# Altium PCB PCB2.PcbDoc (part 1 of 3)
Units mil, origin at the board's own origin, x right, y up, seen from the top; angles counter-clockwise.
Board outline 7000 x 3315 mil, 4 copper layers (Top Signal, GND, PWR, Bottom Signal), stack 23.756 mil thick; 198 components, 124 nets, 690 pads, 273 vias.
Unrouted connection lines stored in the file: 2.
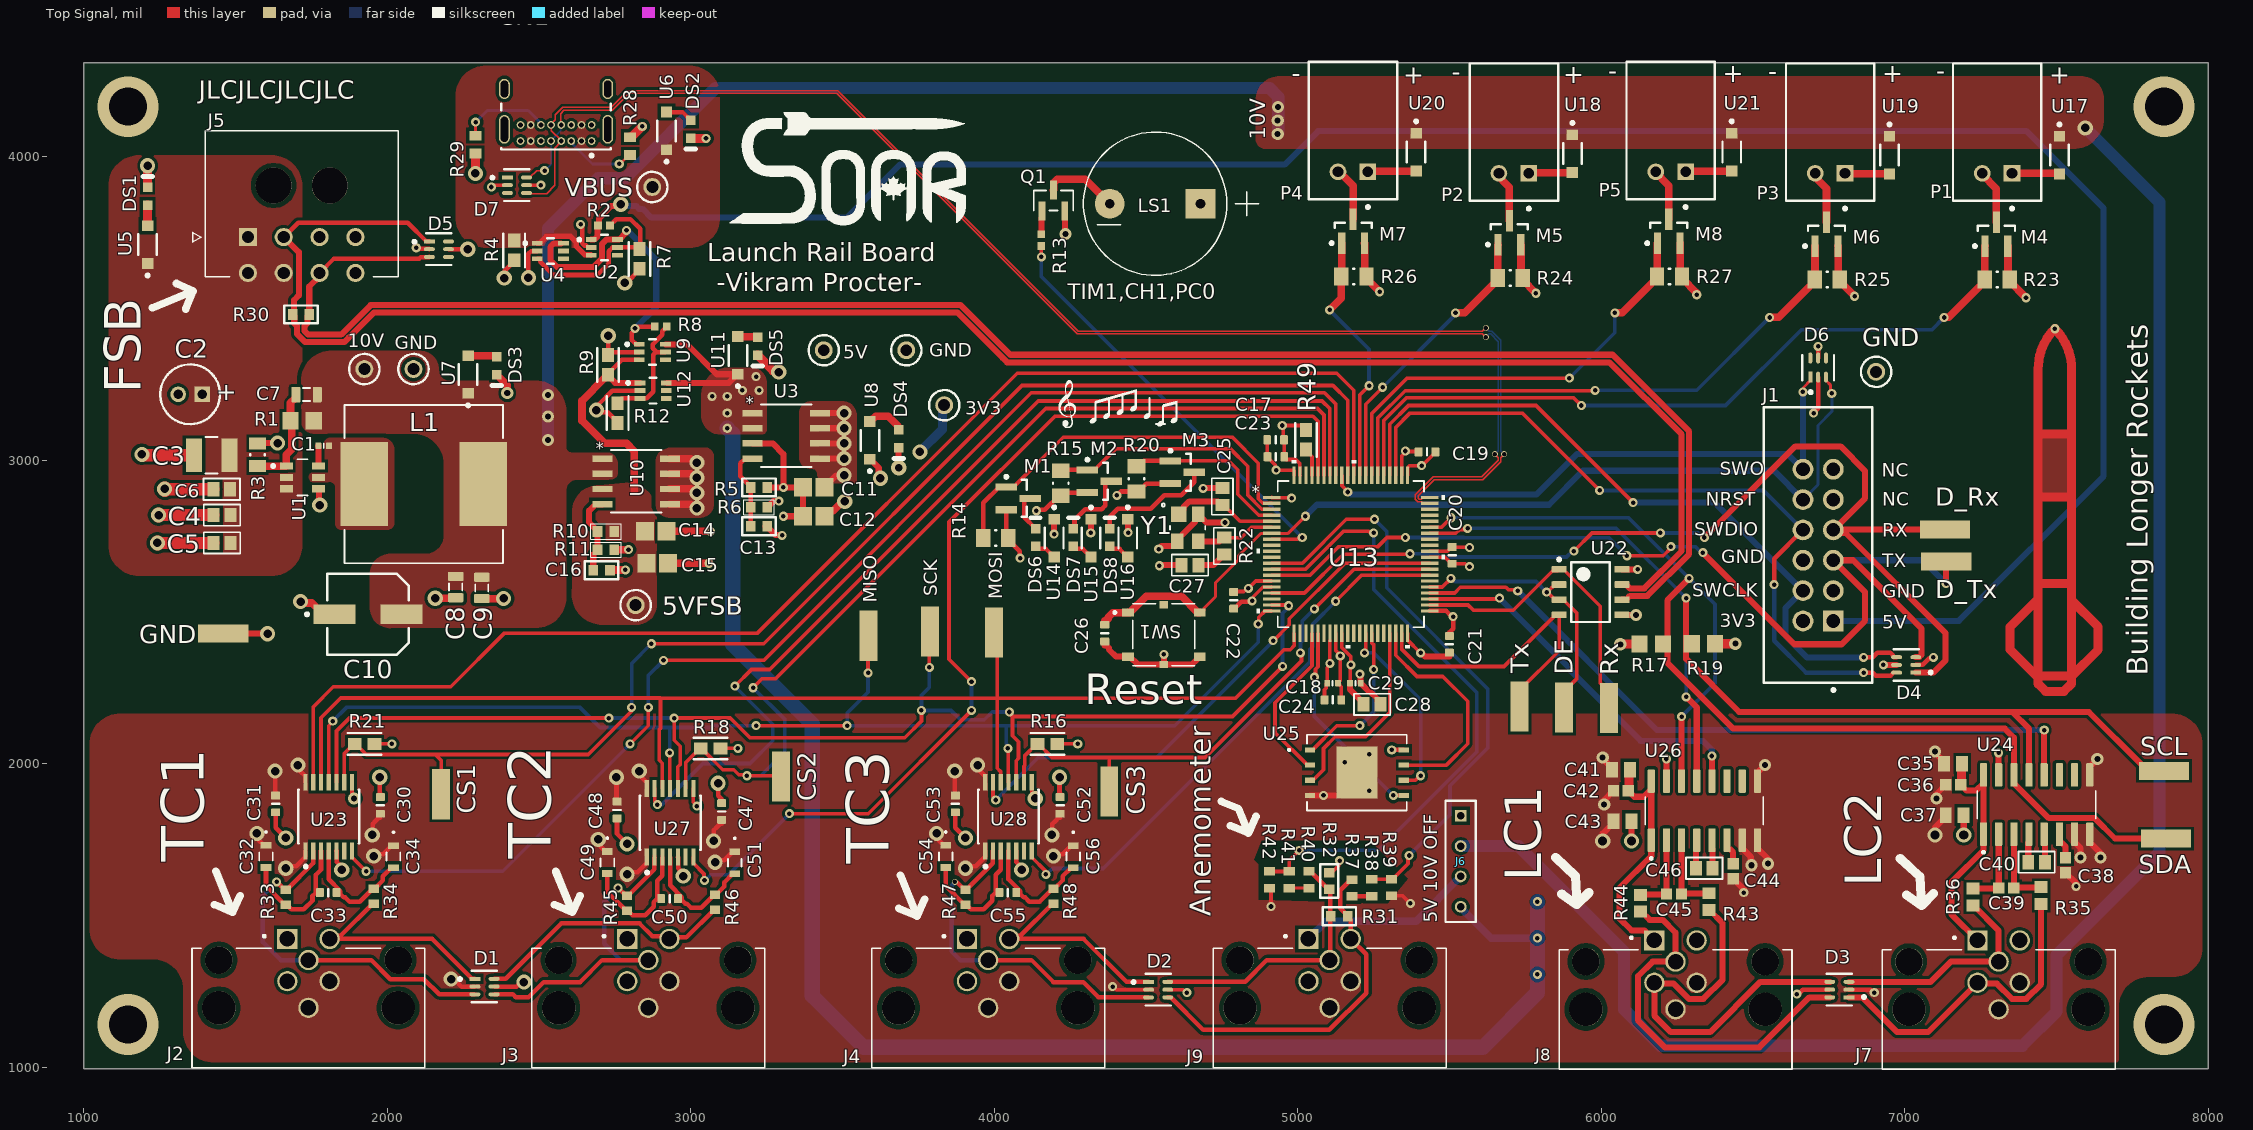
[diagram p0: Top Signal view]
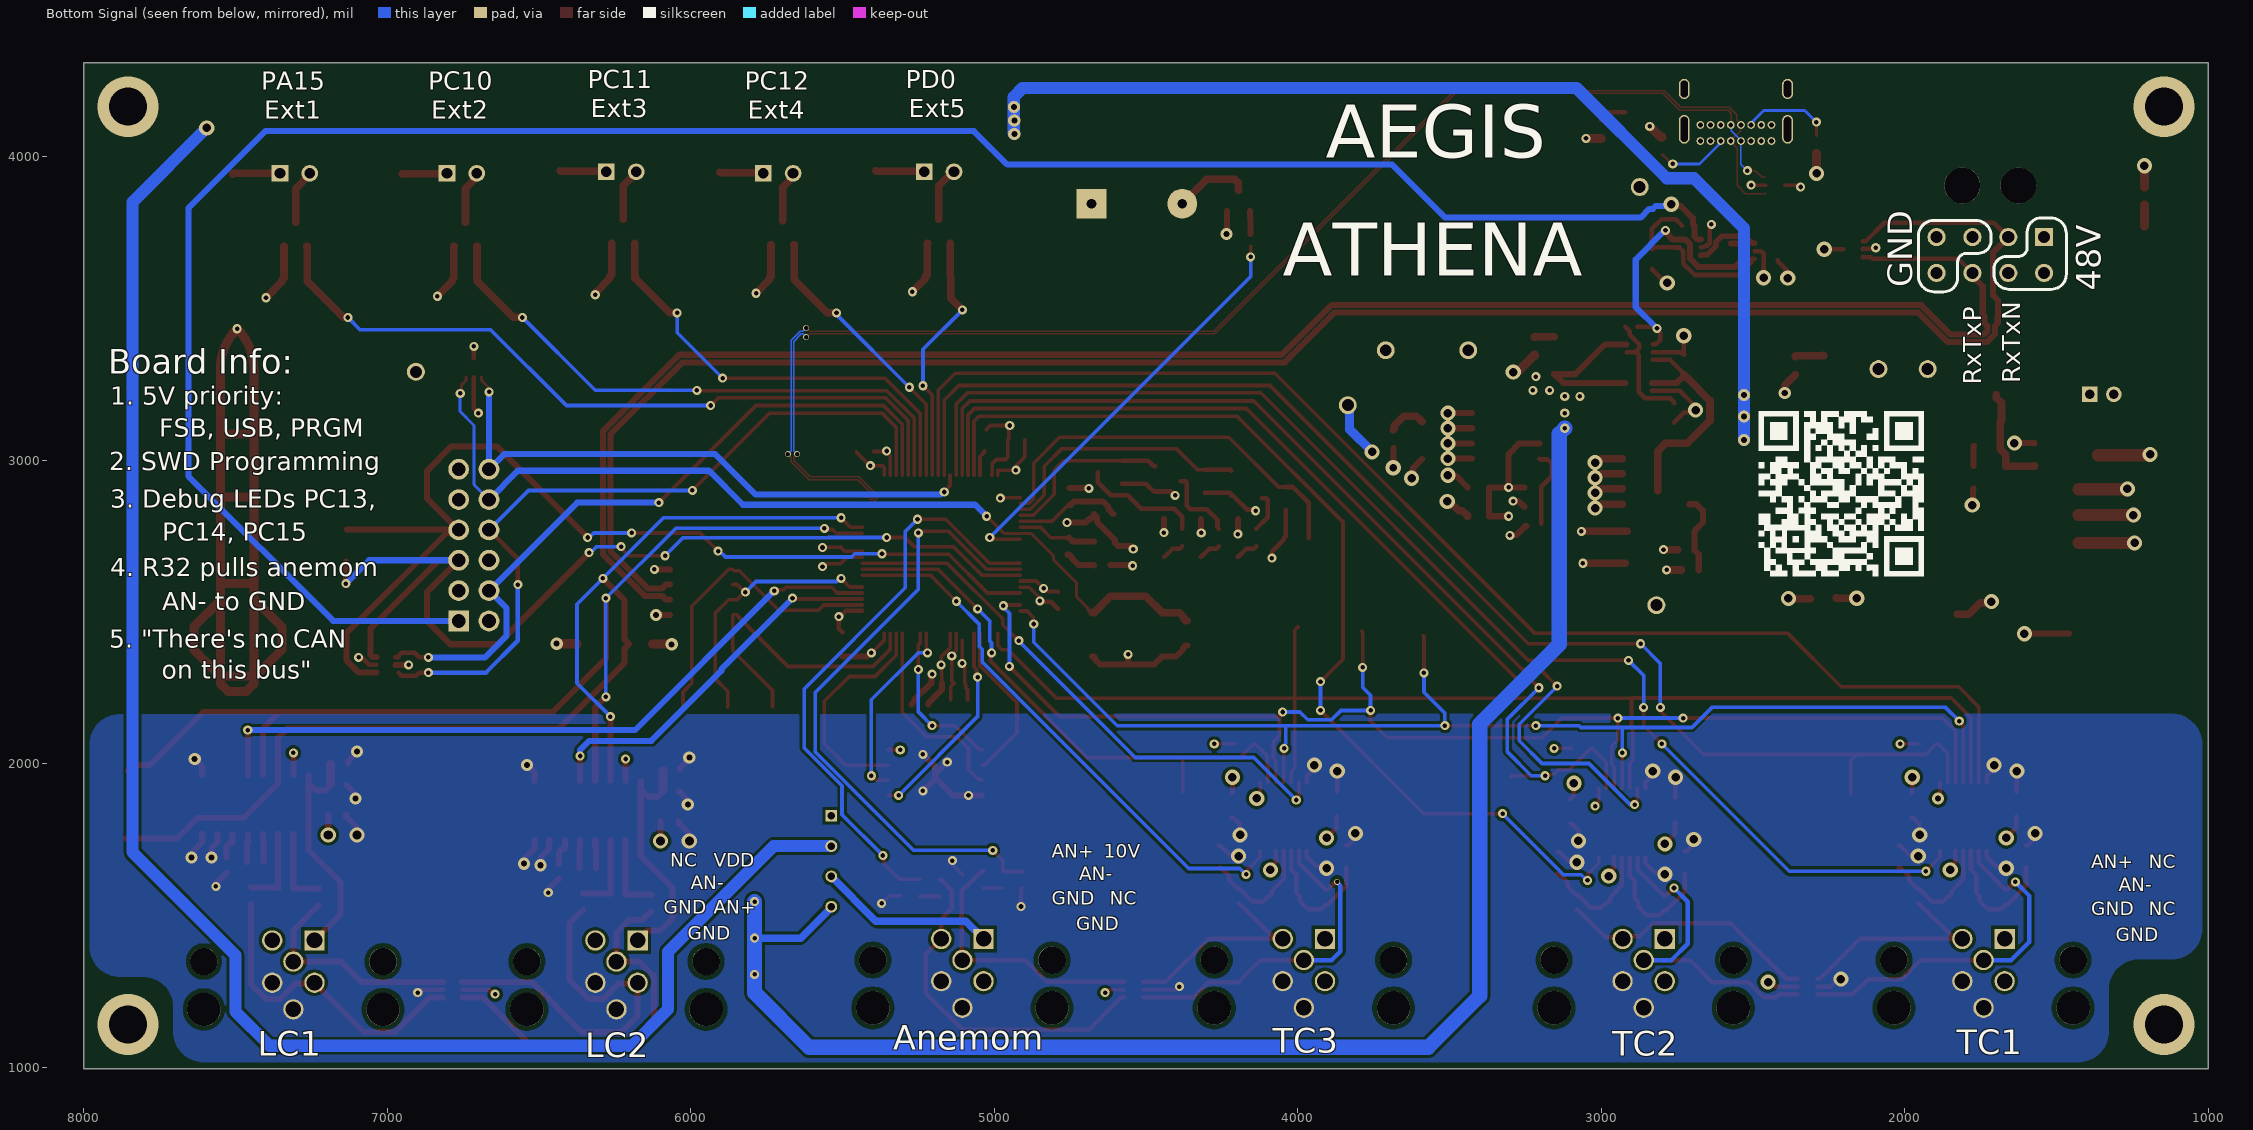
[diagram p1: Bottom Signal view, seen from below]
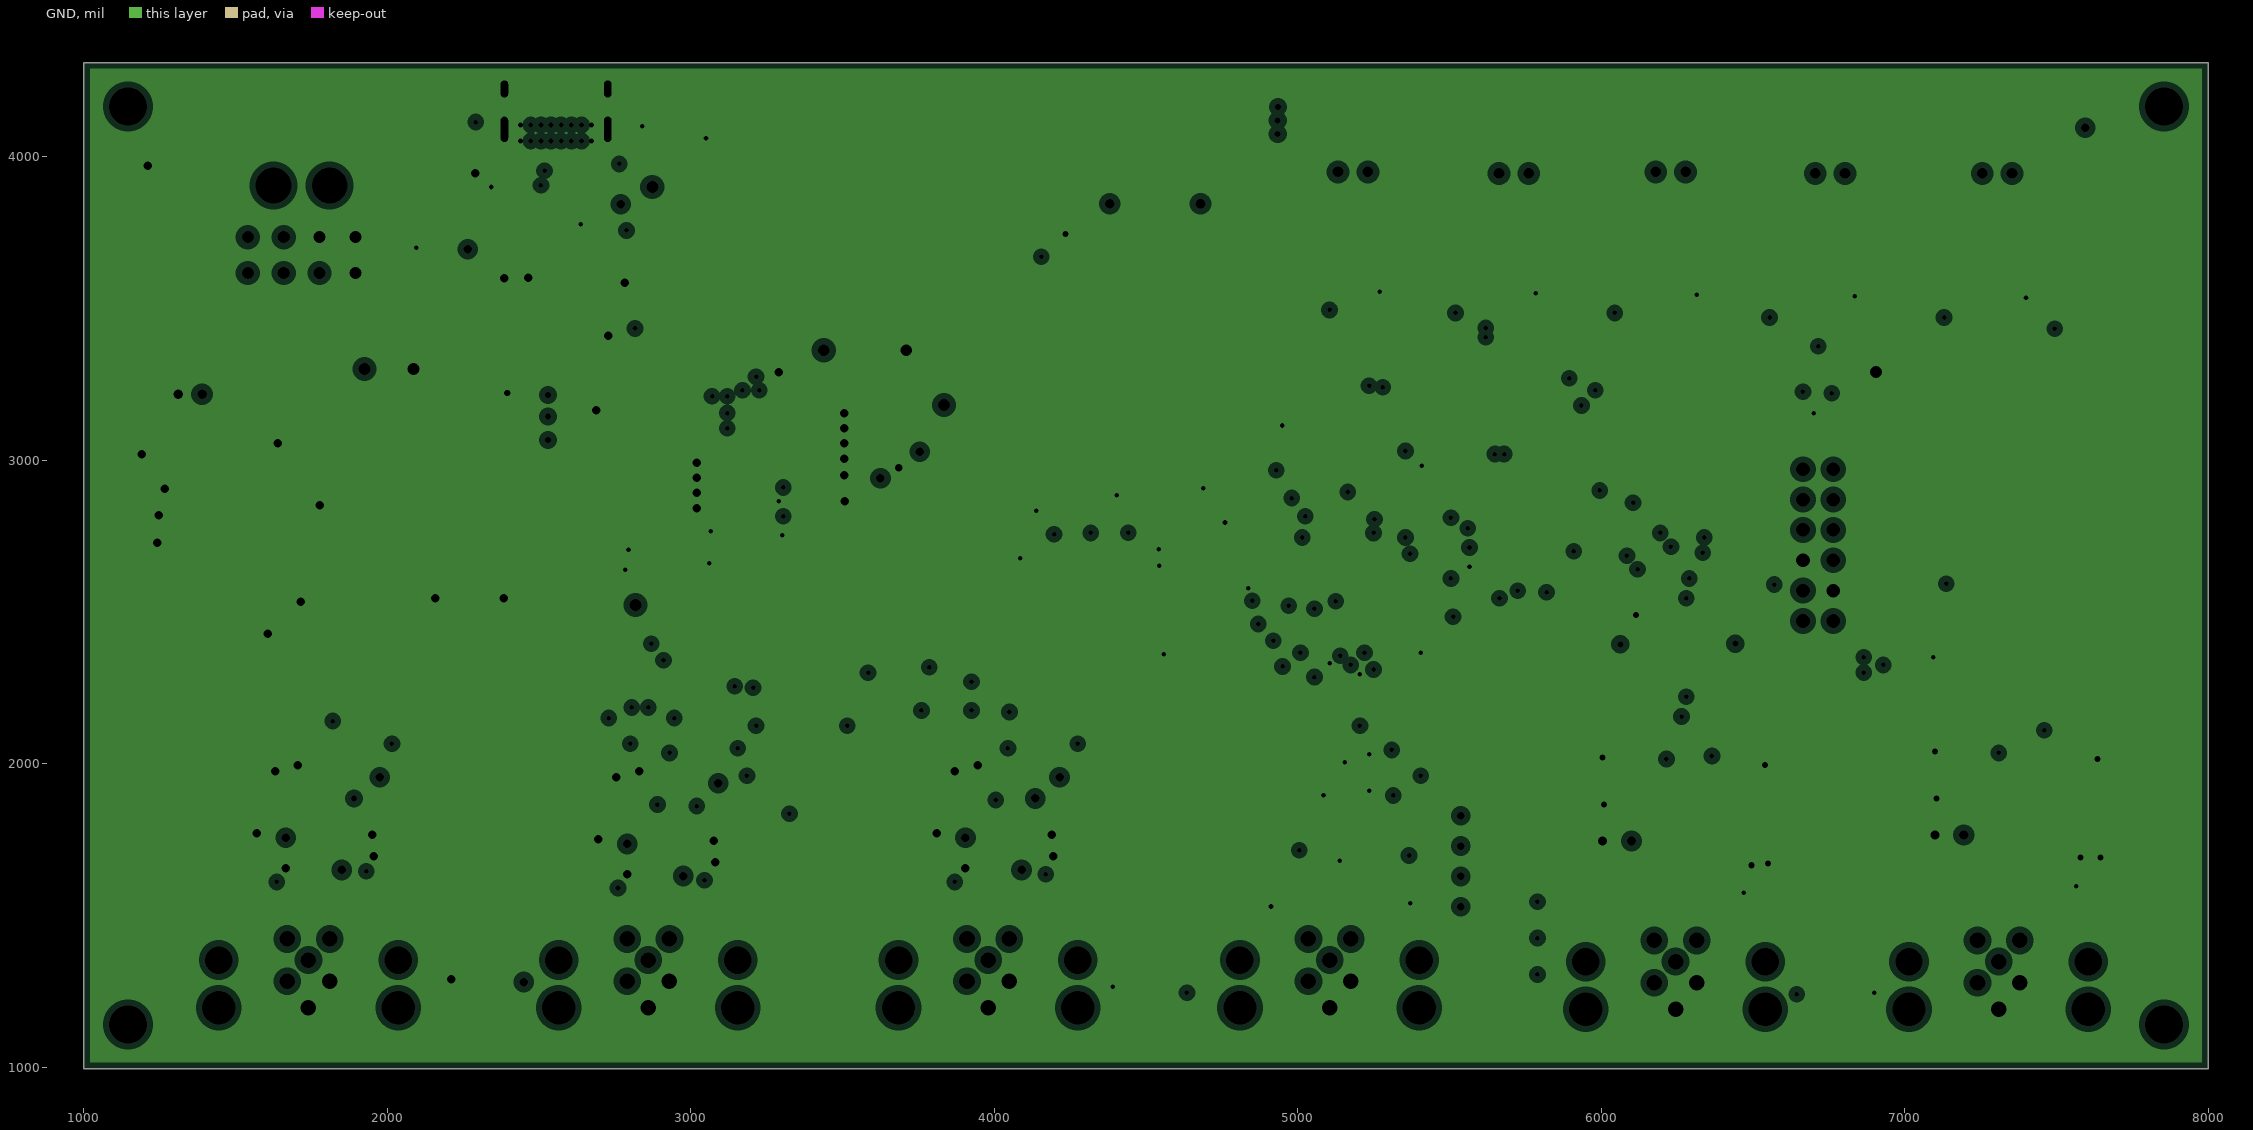
[diagram p2: GND, clearances drawn from the general rule]
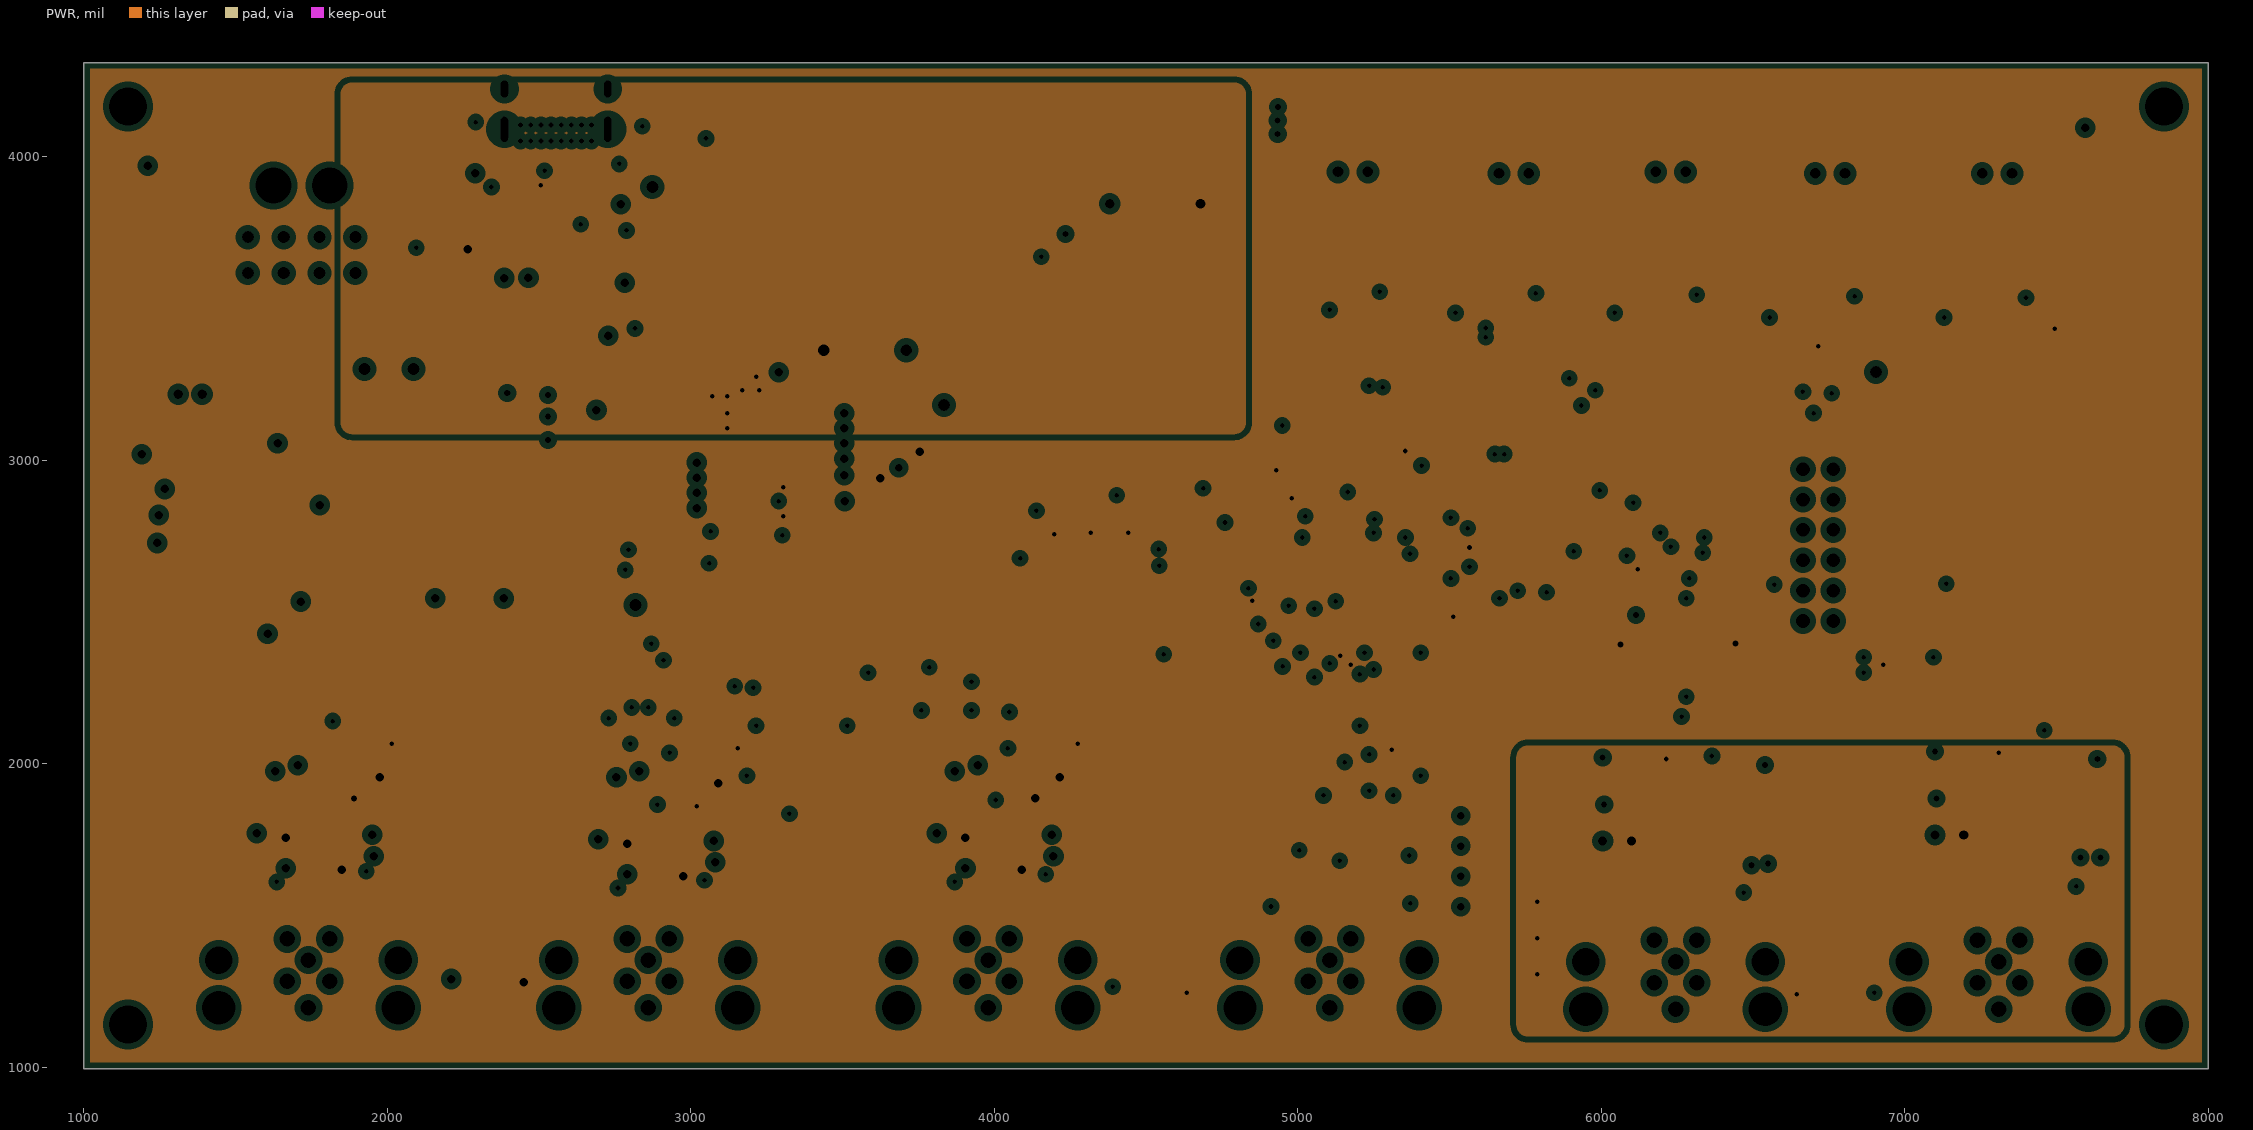
[diagram p3: PWR, clearances drawn from the general rule]
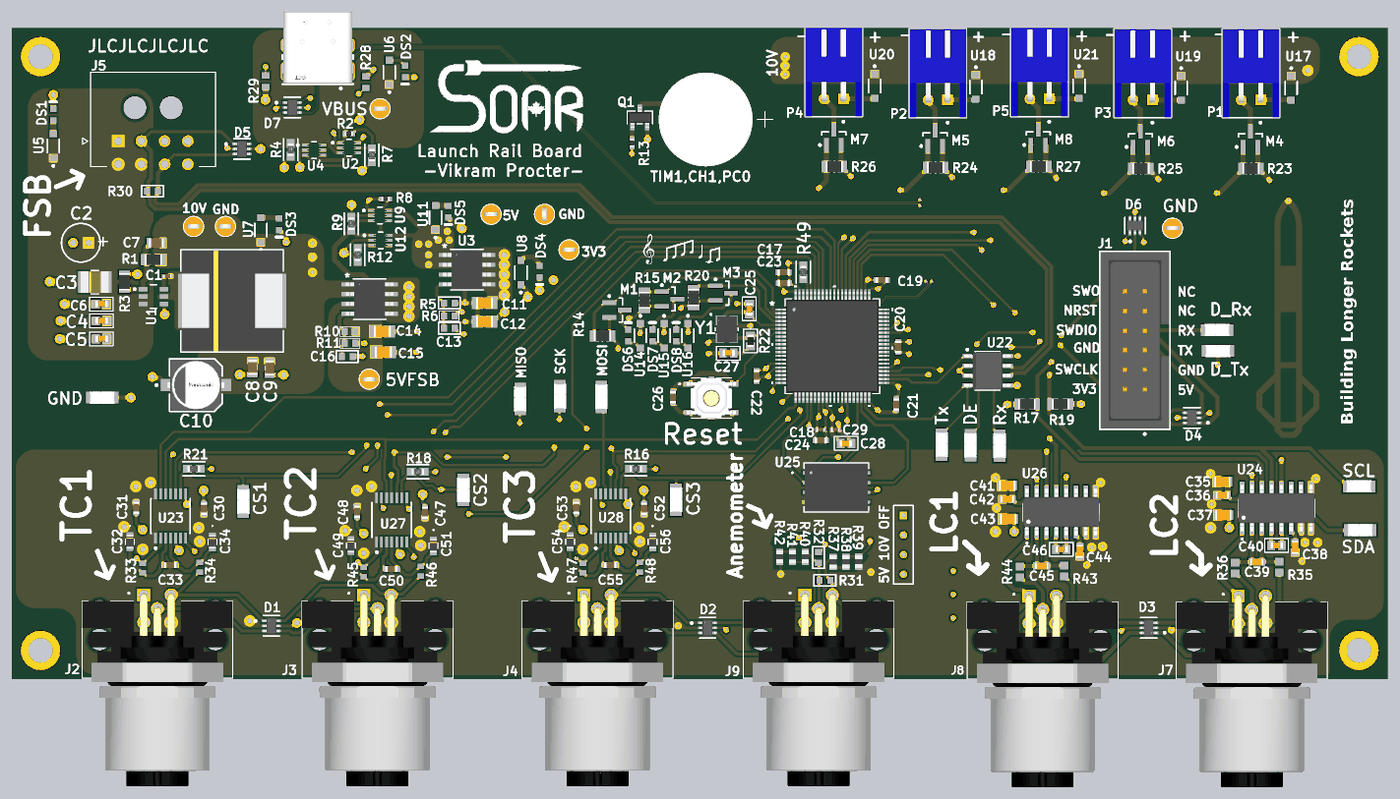
[diagram p6: 3D render of the assembled board from above, using the file's embedded part models]

## Layer stack, top to bottom
Top Solder: solder mask 0.4, Solder Resist, Dk 3.5
Top Signal: signal copper 1.4
Dielectric 2: prepreg 2.8, PP-006, Dk 4.1
GND: plane copper 1.378, net GND
Dielectric 1: dielectric 12.6, FR-4, Dk 4.8
PWR: plane copper 1.378, net (Multiple Nets)
Dielectric 3: prepreg 2.8, PP-006, Dk 4.1
Bottom Signal: signal copper 1.4
Bottom Solder: solder mask 0.4, Solder Resist, Dk 3.5

## Board outline
1000,995 8000,995 8000,4310 1000,4310

## Design rules (kind name [scope] priority, off if disabled: settings)
Clearance [All] p1: gap=10 ignorepadtopadclearanceinfootprint=TRUE except(4: Arc-Arc Arc-Track Arc-SMDPad Track-Track Track-SMDPad; 15: Fill-Fill Fill-Poly Fill-Region Fill-Text Fill-Hole Poly-Poly Poly-Region Poly-Text Poly-Hole Region-Region Region-Text Region-Hole)
DiffPairsRouting DiffPairsRouting_USB [InDifferentialPair('USB_D')] p1: maxlimit=5 minlimit=5 mostfreqgap=5 toplayer_minwidth=4.35 toplayer_maxwidth=4.35 toplayer_prefwidth=4.35 bottomlayer_minwidth=4.35 bottomlayer_maxwidth=4.35 bottomlayer_prefwidth=4.35 impedanceprofiledriven=TRUE impedanceprofileid={C0B74BD8-7DF2-4B69-BD24-AA38E4ED02D4} impedanceprofilevalue=90.000000 maxuncoupledlength=500
DiffPairsRouting [All] p2: maxlimit=5 minlimit=5 mostfreqgap=5 toplayer_minwidth=5 toplayer_maxwidth=50 toplayer_prefwidth=12.64 bottomlayer_minwidth=5 bottomlayer_maxwidth=50 bottomlayer_prefwidth=12.64 maxuncoupledlength=500
HoleSize [All] p1: absolutevalues=TRUE maxlimit=200 minlimit=6 maxpercent=80.000 minpercent=20.000
MinimumSolderMaskSliver [All] p1: minsoldermaskwidth=1
PlaneClearance [All] p1: clearance=20
PlaneConnect [All] p1: planeconnectstyle=Direct reliefexpansion=20 reliefentries=4 reliefconductorwidth=10 reliefairgap=10
PolygonConnect [All] p1: connectstyle=Direct reliefconductorwidth=10 reliefentries=4 polygonreliefangle="90 Angle" airgapwidth=10
RoomDefinition U_Anemometor_ResDiv1 [InComponentClass('U_Anemometor_ResDiv1')] p1: confinementstyle=ConfineIn formatcopy=TRUE lockcomponents=FALSE outline 5145,1478.15 5415,1478.15 5415,1725 5145,1725
RoomDefinition U_Anemometor_ResDiv2 [InComponentClass('U_Anemometor_ResDiv2')] p2: confinementstyle=ConfineIn formatcopy=TRUE lockcomponents=FALSE outline 4865,1480 5135,1480 5135,1725 4865,1725
RoomDefinition U_TC_IC1 [InComponentClass('U_TC_IC1')] p3: confinementstyle=ConfineIn formatcopy=TRUE lockcomponents=FALSE outline 1555,1505 2065,1505 2065,2235 1555,2235
RoomDefinition Ext_LED2 [InComponentClass('Ext_LED2')] p4: confinementstyle=ConfineIn formatcopy=TRUE lockcomponents=FALSE outline 6575,3485 7000,3485 7000,4130 6575,4130
RoomDefinition U_TC_IC2 [InComponentClass('U_TC_IC2')] p5: confinementstyle=ConfineIn formatcopy=TRUE lockcomponents=FALSE outline 2680,1485 3190,1485 3190,2215 2680,2215
RoomDefinition U_TC_IC3 [InComponentClass('U_TC_IC3')] p6: confinementstyle=ConfineIn formatcopy=TRUE lockcomponents=FALSE outline 3795,1505 4305,1505 4305,2235 3795,2235
RoomDefinition U_LoadCellAmp2 [InComponentClass('U_LoadCellAmp2')] p7: confinementstyle=ConfineIn formatcopy=TRUE lockcomponents=FALSE outline 6000,1460 6560,1460 6560,2025 6000,2025
RoomDefinition U_LoadCellAmp1 [InComponentClass('U_LoadCellAmp1')] p8: confinementstyle=ConfineIn formatcopy=TRUE lockcomponents=FALSE outline 7095,1480 7655,1480 7655,2045 7095,2045
RoomDefinition Ext_LED3 [InComponentClass('Ext_LED3')] p9: confinementstyle=ConfineIn formatcopy=TRUE lockcomponents=FALSE outline 6055,3495 6480,3495 6480,4140 6055,4140
RoomDefinition Ext_LED4 [InComponentClass('Ext_LED4')] p10: confinementstyle=ConfineIn formatcopy=TRUE lockcomponents=FALSE outline 5530,3490 5955,3490 5955,4135 5530,4135
RoomDefinition Ext_LED1 [InComponentClass('Ext_LED1')] p11: confinementstyle=ConfineIn formatcopy=TRUE lockcomponents=FALSE outline 7135,3485 7560,3485 7560,4130 7135,4130
RoomDefinition Ext_Led5 [InComponentClass('Ext_Led5')] p12: confinementstyle=ConfineIn formatcopy=TRUE lockcomponents=FALSE outline 5015,3495 5440,3495 5440,4140 5015,4140
RoutingVias [All] p1: holewidth=28 width=50 viastyle="Through Hole" minholewidth=7 minwidth=10 maxholewidth=240 maxwidth=300
SilkToSilkClearance [All] p1: silktosilkclearance=1
SilkToSolderMaskClearance [IsPad] p1: minsilkscreentomaskgap=4 clearancetoexposedcopper=TRUE
SolderMaskExpansion [All] p1: expansion=4 istentingtop=FALSE
SupplyNets "Schematic Supply Nets_4" [InNet('+5V_Prgm')] p1: voltage=0.000
SupplyNets "Schematic Supply Nets_2" [InNet('GND')] p2: voltage=0.000
SupplyNets "Schematic Supply Nets_7" [InNet('+5V_FSB')] p3: voltage=0.000
SupplyNets "Schematic Supply Nets_6" [InNet('VBUS_USB')] p4: voltage=0.000
SupplyNets "Schematic Supply Nets_5" [InNet('+10V')] p5: voltage=0.000
SupplyNets "Schematic Supply Nets_3" [InNet('+5V')] p6: voltage=0.000
SupplyNets "Schematic Supply Nets_1" [InNet('+3V3')] p7: voltage=0.000
SupplyNets "Schematic Supply Nets" [InNet('+48V')] p8: voltage=0.000
Width [All] p1: maxlimit=50 minlimit=5 preferedwidth=10
23 further rules are at their usual default settings.

## Classes and differential pairs
component class Ext_Led5: M7 R26 U20
component class Ext_LED4: M5 R24 U18
component class Ext_LED3: M8 R27 U21
component class Ext_LED2: M6 R25 U19
component class Ext_LED1: M4 R23 U17
component class U_TC_IC3: C52 C53 C54 C55 C56 R47 R48 U28
component class U_TC_IC2: C47 C48 C49 C50 C51 R45 R46 U27
component class U_TC_IC1: C30 C31 C32 C33 C34 R33 R34 U23
component class U_QuadSPIFlash: U25
component class U_PowerCircuitry: C1 C2 C3 C4 C5 C6 C7 C8 C9 C10 C11 C12 C13 C14 C15 C16 DS1 DS2 DS3 DS4 DS5 L1 R1 R2 R3 R4 R5 R6 R7 R8 R9 R10 R11 R12 TP1 TP2 TP3 TP4 TP5 TP6 TP7 U1 U2 U3 U4 U5 U6 U7 U8 U9 U10 U11 U12
component class U_MicroController: C17 C18 C19 C20 C21 C22 C23 C24 C25 C26 C27 C28 C29 DS6 DS7 DS8 LS1 M1 M2 M3 Q1 R13 R14 R15 R16 R17 R18 R19 R20 R21 R22 R49 SW1 U14 U15 U16 Y1
component class U_LoadCellAmp2: C41 C42 C43 C44 C45 C46 R43 R44 U26
component class U_LoadCellAmp1: C35 C36 C37 C38 C39 C40 R35 R36 U24
component class U_Anemometor_ResDiv2: R40 R41 R42
component class U_Anemometor_ResDiv1: R37 R38 R39
differential pair FSB_RS485_RxTx: +FSB_RS485_RxTx_P -FSB_RS485_RxTx_N
differential pair USB_D: +USB_D_P -USB_D_N

## Components (designator, comment, footprint, x,y, rotation, side; value= is the part's Value field where it differs from the comment)
3V3 "5003" KSTN-5003 3835,3181 r0 top (schematic designator TP8)
5V "5003" KSTN-5003 3438,3362 r0 top (schematic designator TP7)
5VFSB "5003" KSTN-5003 2818,2522 r0 top (schematic designator TP5)
10V "5003" KSTN-5003 1924,3300 r0 top (schematic designator TP4)
C1 "Capacitor 100nF +/-20% 50V 0402" CAPC0402(1005)60_L 1790,3047 r180 top value=100nF
C2 "CAP ELC 2.2uF 50V 20%" CAPPR55-200-1100X500X1200 1350,3217 r180 top value=2.2µF
C3 "CAP CER 100nF 100V 10% 1210" CL32B475KCVZW6E-Footprint-1 1421,3016 r0 top value=100nF
C4 "CAP CER  1uF 50V X5R 0603" CAP_0603_LD 1455,2819 r0 top value=1µF
C5 "CAP CER  1uF 50V X5R 0603" CAP_0603_LD 1455,2727 r0 top value=1µF
C6 "CAP CER  1uF 50V X5R 0603" CAP_0603_LD 1454,2904 r0 top value=1µF
C7 "Capacitor 10µF +/-20% 25V 0805" CAPC0805(2012)145_L 1734,3216 r0 top value=10µF
C8 "Capacitor 10µF +/-20% 25V 0805" CAPC0805(2012)145_L 2225,2582 r90 top value=10µF
C9 "Capacitor 10µF +/-20% 25V 0805" CAPC0805(2012)145_L 2311,2579 r90 top value=10µF
C10 "CAP ELC 47uF 25V 20% 2626" FP-OS-CON-SMT-C6-MFG 1936,2492 r0 top value=47µF
C11 "Capacitor 1 uF +/- 10% 25 V 0805" CAPC2013X145X50ML20T25 3405,2910 r0 top value=1µF
C12 "Capacitor 1 uF +/- 10% 25 V 0805" CAPC2013X145X50ML20T25 3405,2815 r0 top value=1µF
C13 "CAP 470pF FILM 16V 0603" "Copy of 0603" 3225,2782 r180 top value=470pF
C14 "Capacitor 1 uF +/- 10% 25 V 0805" CAPC2013X145X50ML20T25 2885,2765 r0 top value=1µF
C15 "Capacitor 1 uF +/- 10% 25 V 0805" CAPC2013X145X50ML20T25 2890,2660 r0 top value=1µF
C16 "CAP 470pF FILM 16V 0603" "Copy of 0603" 2706,2637 r180 top value=470pF
C17 "CAP CER 4.7µF +/-20% 10V 0603" "Copy of CAPC0603(1608)100_L" 4927,3067 r180 top value=4.7µF
C18 "Capacitor 1µF +/-20% 10V 0402" CAPC0402(1005)60_L 5115,2265 r0 top value=1µF
C19 "CAP CER 0.1UF 25V 0603" 0.1uF-FP-CGA3E-0_3-0_1-IPC_A 5426,3027 r180 top value=100nF
C20 "CAP CER 0.1UF 25V 0603" 0.1uF-FP-CGA3E-0_3-0_1-IPC_A 5509,2686 r90 top value=100nF
C21 "CAP CER 0.1UF 25V 0603" 0.1uF-FP-CGA3E-0_3-0_1-IPC_A 5500,2393 r90 top value=100nF
C22 "CAP CER 0.1UF 25V 0603" 0.1uF-FP-CGA3E-0_3-0_1-IPC_A 4789,2538 r270 top value=100nF
C23 "CAP CER 0.1UF 25V 0603" 0.1uF-FP-CGA3E-0_3-0_1-IPC_A 4928,3011 r180 top value=100nF
C24 "CAP CER 0.1UF 25V 0603" 0.1uF-FP-CGA3E-0_3-0_1-IPC_A 5116,2210 r0 top value=100nF
C25 "CAP CER 22pF 5% 50V C0G 0603" CAP_0603_LD 4752,2880 r270 top value=22pF
C26 "CAP CER 0.1UF 25V 0603" 0.1uF-FP-CGA3E-0_3-0_1-IPC_A 4364,2430 r90 top value=100nF
C27 "CAP CER 22pF 5% 50V C0G 0603" CAP_0603_LD 4645,2654 r0 top value=22pF
C28 "CAP CER 10nF 50V 10% 0603" CAP_0603 5245,2195 r180 top value=10nF
C29 "Capacitor 1µF +/-20% 10V 0402" CAPC0402(1005)60_L 5190,2265 r180 top value=1µF
C30 "CAP CER 0.1UF 25V 0603" 0.1uF-FP-CGA3E-0_3-0_1-IPC_A 1976.77,1862 r270 top value=100nF
C31 "CAP CER 0.1UF 25V 0603" 0.1uF-FP-CGA3E-0_3-0_1-IPC_A 1631.77,1867 r90 top value=100nF
C32 "CGA3E2X7R1H103K080AA" 10000pF-CAP_1608_TDK 1600,1693.98 r270 top value=10nF
C33 "CAP CER 0.1UF 25V 0603" 0.1uF-FP-CGA3E-0_3-0_1-IPC_A 1805,1575 r180 top value=100nF
C34 "CGA3E2X7R1H103K080AA" 10000pF-CAP_1608_TDK 2020,1693.19 r270 top value=10nF
C35 "Capacitor 1 uF +/- 10% 50 V 0805" CAPC2013X135X45ML10T25 7160,2000 r180 top value=1µF
C36 "Capacitor 100 nF +/-10% 50 V 0603" CAPC1608X90X40NL10T20 7160,1930 r0 top value=100nF
C37 "Capacitor 1 uF +/- 10% 50 V 0805" CAPC2013X135X45ML10T25 7165,1830 r180 top value=1µF
C38 "Capacitor 100 nF +/-10% 50 V 0603" CAPC1608X90X40NL10T20 7530,1665 r90 top value=100nF
C39 "Capacitor 100 nF +/-10% 50 V 0603" CAPC1608X90X40NL10T20 7335,1590 r0 top value=100nF
C40 "CAP CER 330pF 50V 1% 0603" CAP_0603 7435,1675 r0 top value=330pF
C41 "Capacitor 1 uF +/- 10% 50 V 0805" CAPC2013X135X45ML10T25 6065,1980 r180 top value=1µF
C42 "Capacitor 100 nF +/-10% 50 V 0603" CAPC1608X90X40NL10T20 6065,1910 r0 top value=100nF
C43 "Capacitor 1 uF +/- 10% 50 V 0805" CAPC2013X135X45ML10T25 6070,1810 r180 top value=1µF
C44 "Capacitor 100 nF +/-10% 50 V 0603" CAPC1608X90X40NL10T20 6435,1645 r90 top value=100nF
C45 "Capacitor 100 nF +/-10% 50 V 0603" CAPC1608X90X40NL10T20 6240,1570 r0 top value=100nF
C46 "CAP CER 330pF 50V 1% 0603" CAP_0603 6340,1655 r0 top value=330pF
C47 "CAP CER 0.1UF 25V 0603" 0.1uF-FP-CGA3E-0_3-0_1-IPC_A 3101.77,1842 r270 top value=100nF
C48 "CAP CER 0.1UF 25V 0603" 0.1uF-FP-CGA3E-0_3-0_1-IPC_A 2756.77,1847 r90 top value=100nF
C49 "CGA3E2X7R1H103K080AA" 10000pF-CAP_1608_TDK 2725,1673.98 r270 top value=10nF
C50 "CAP CER 0.1UF 25V 0603" 0.1uF-FP-CGA3E-0_3-0_1-IPC_A 2930,1555 r180 top value=100nF
C51 "CGA3E2X7R1H103K080AA" 10000pF-CAP_1608_TDK 3145,1673.19 r270 top value=10nF
C52 "CAP CER 0.1UF 25V 0603" 0.1uF-FP-CGA3E-0_3-0_1-IPC_A 4216.77,1862 r270 top value=100nF
C53 "CAP CER 0.1UF 25V 0603" 0.1uF-FP-CGA3E-0_3-0_1-IPC_A 3871.77,1867 r90 top value=100nF
C54 "CGA3E2X7R1H103K080AA" 10000pF-CAP_1608_TDK 3840,1693.98 r270 top value=10nF
C55 "CAP CER 0.1UF 25V 0603" 0.1uF-FP-CGA3E-0_3-0_1-IPC_A 4045,1575 r180 top value=100nF
C56 "CGA3E2X7R1H103K080AA" 10000pF-CAP_1608_TDK 4260,1693.19 r270 top value=10nF
CN1 "USB4085-GF-A" FP-USB4085-GF-A-MFG 2556,4210 r180 top
CS1 "TP Clip 1206  RCWCTE" "1206 TP Clip RCWCTE-Footprint-1" 2177,1899 r90 top
CS2 "TP Clip 1206  RCWCTE" "1206 TP Clip RCWCTE-Footprint-1" 3297,1957 r90 top
CS3 "TP Clip 1206  RCWCTE" "1206 TP Clip RCWCTE-Footprint-1" 4379,1908 r90 top
D1 "DI TVS 6V" FP-SOT363-IPC_C 2320,1265 r0 top
D2 "DI TVS 6V" FP-SOT363-IPC_C 4540,1255 r0 top
D3 "DI TVS 6V" FP-SOT363-IPC_C 6785,1255 r180 top
D4 "DI TVS 6V" FP-SOT363-IPC_C 7005,2325 r180 top
D5 "DI TVS 6V" FP-SOT363-IPC_C 2170,3695 r0 top
D6 "DI TVS 6V" FP-SOT363-IPC_C 6715,3305 r90 top
D7 "DI TVS 6V" FP-SOT363-IPC_C 2427,3906 r0 top
D_Rx "TP Clip 1206  RCWCTE" "1206 TP Clip RCWCTE-Footprint-1" 7133,2772 r180 top
D_Tx "TP Clip 1206  RCWCTE" "1206 TP Clip RCWCTE-Footprint-1" 7137,2666 r180 top
DE "TP Clip 1206  RCWCTE" "1206 TP Clip RCWCTE-Footprint-1" 5878,2185 r90 top
DS1 "LTST-C190KRKT" LTST-C191KRKT_V 1210,3870 r90 top
DS2 "LTST-C190KRKT" LTST-C191KRKT_V 3000,4090 r270 top
DS3 "LTST-C190KRKT" LTST-C191KRKT_V 2360,3311 r270 top
DS4 "LTST-C190KRKT" LTST-C191KRKT_V 3685,3070 r270 top
DS5 "LTST-C190KRKT" LTST-C191KRKT_V 3220,3375 r270 top
DS6 "LTST-C190KRKT" LTST-C191KRKT_V 4136,2745 r90 top
DS7 "LTST-C190KRKT" LTST-C191KRKT_V 4260,2745 r90 top
DS8 "HSMG-C190" AVAG-HSMX-C190_V 4380,2745 r90 top
GND "5003" KSTN-5003 3710,3362 r90 top (schematic designator TP3)
GND "TP Clip 1206  RCWCTE" "1206 TP Clip RCWCTE-Footprint-1" 1459,2428 r180 top
GND "5003" KSTN-5003 6906,3291 r0 top (schematic designator TP2)
GND "5003" KSTN-5003 2086,3300 r0 top (schematic designator TP1)
J1 "CON 0702461201" FP-70246-1201-0 6715,2720 r90 top
J2 "CON 54-00247" "CON 54-00247-Footprint-1" 1740,1352.48 r0 top
J3 "CON 54-00247" "CON 54-00247-Footprint-1" 2859.86,1352.48 r0 top
J4 "CON 54-00247" "CON 54-00247-Footprint-1" 3979.72,1352.48 r0 top
J5 "CON 0430450800" "CON 0430450800-Footprint-1" 1540.32,3734.92 r180 top
J6 "2.54mm" "HEADER 4pos 2.54mm-Footprint-1" 5537,1678 r270 top
J7 "CON 54-00247" "CON 54-00247-Footprint-1" 7309.72,1347.48 r0 top
J8 "CON 54-00247" "CON 54-00247-Footprint-1" 6245,1347.48 r0 top
J9 "CON 54-00247" "CON 54-00247-Footprint-1" 5105,1352.48 r0 top
L1 "IND WIR 22uH 3.5A 20%" "IND WIR 22uH 3.5A 20%-Footprint-1" 2120,2921 r0 top value=22µH
LS1 "BUZZ MAG 5V 12MM TH" CMI-1210-5-95T-Footprint-1 4530,3845 r180 top
M1 "MOS NMOS 30V 5.6A SOT-23" PJA3404_R1_00001-Footprint-1 4079,2874 r0 top
M2 "MOS NMOS 30V 5.6A SOT-23" PJA3404_R1_00001-Footprint-1 4346.37,2930.4 r0 top
M3 "MOS NMOS 30V 5.6A SOT-23" PJA3404_R1_00001-Footprint-1 4620,2960 r0 top
M4 "MOS NMOS 30V 5.6A SOT-23" PJA3404_R1_00001-Footprint-1 7302.6,3744.37 r90 top
M5 "MOS NMOS 30V 5.6A SOT-23" PJA3404_R1_00001-Footprint-1 5697.6,3749.37 r90 top
M6 "MOS NMOS 30V 5.6A SOT-23" PJA3404_R1_00001-Footprint-1 6742.6,3744.37 r90 top
M7 "MOS NMOS 30V 5.6A SOT-23" PJA3404_R1_00001-Footprint-1 5182.6,3754.37 r90 top
M8 "MOS NMOS 30V 5.6A SOT-23" PJA3404_R1_00001-Footprint-1 6222.6,3754.37 r90 top
MISO "TP Clip 1206  RCWCTE" "1206 TP Clip RCWCTE-Footprint-1" 3586,2421 r90 top
MOSI "TP Clip 1206  RCWCTE" "1206 TP Clip RCWCTE-Footprint-1" 3999,2432 r90 top
P1 "S2B-XH-A(LF)(SN)" JST-S2B-XH-A(LF)(SN)_V 7305,3945 r180 top
P2 "S2B-XH-A(LF)(SN)" JST-S2B-XH-A(LF)(SN)_V 5712.3,3945 r180 top
P3 "S2B-XH-A(LF)(SN)" JST-S2B-XH-A(LF)(SN)_V 6754.61,3945 r180 top
P4 "S2B-XH-A(LF)(SN)" JST-S2B-XH-A(LF)(SN)_V 5181.91,3950 r180 top
P5 "S2B-XH-A(LF)(SN)" JST-S2B-XH-A(LF)(SN)_V 6229.21,3950 r180 top
Q1 "NPN 350mW 40V 200mA" MMBT3904-TP-Footprint-1 4195,3855.5 r0 top
R1 "Resistor 100k +/-1% 0805 125 mW" RESC2013X70X40ML20T20 1719,3130 r0 top value=100k
R2 "Resistor 10k +/-1% 0402 100 mW" RESC1005X40X25ML05T05 2714,3773 r180 top value=10k
R3 "RES 8.66K OHM 1% 1/8W 0805" "RES 8.66K OHM 1% 1_8W 0805-Footprint-1" 1572,3018 r90 top value=8.66k
R4 "RMCF0603FT220K" FP-CRGCQ0603-IPC_A 2418,3691 r270 top value=220k
R5 "RES 43.5kR 0.15W 0.1% 0603" 0603 3225,2910 r0 top value=45.3k
R6 "RES 75k 1% 0.1W 0603" "RES 75k 1% 0.1W 0603-Footprint-1" 3225,2845 r180 top value=75k
R7 "RMCF0603FT220K" FP-CRGCQ0603-IPC_A 2831,3663 r270 top value=220k
R8 "Resistor 10k +/-1% 0402 100 mW" RESC1005X40X25ML05T05 2901,3440 r180 top value=10k
R9 "RMCF0603FT220K" FP-CRGCQ0603-IPC_A 2727,3314 r90 top value=220k
R10 "RES 15.8k 1% 0.1W 0603" "RES 15.8k 1% 0.1W 0603-Footprint-1" 2720,2765 r0 top value=15.8k
R11 "RES 47.5k 1% 0.1W 0603" "RES 47.5k 1% 0.1W 0603-Footprint-1" 2720,2705 r180 top value=47.5k
R12 "RMCF0603FT220K" FP-CRGCQ0603-IPC_A 2759,3155 r270 top value=220k
R13 "ERJ-2GEJ241x" RESC1005X40X25ML05T05 4155,3725 r90 top value=240
R14 "Resistor 10k +/-1% 0805 125 mW" RESC2013X50X35ML15T15 4005,2743 r0 top value=10k
R15 "Resistor 10k +/-1% 0805 125 mW" RESC2013X50X35ML15T15 4219,2924 r270 top value=10k
R16 "CRGCQ0603F2K2" FP-CRGCQ0603-IPC_A 4175,2065 r0 top
R17 "Resistor 4k7 +/-1% 0805 125 mW" RESC2013X70X40ML20T20 6165,2394 r0 top value=4.7k
R18 "CRGCQ0603F2K2" FP-CRGCQ0603-IPC_A 3065,2050 r0 top
R19 "Resistor 4k7 +/-1% 0805 125 mW" RESC2013X70X40ML20T20 6337,2395 r180 top value=4.7k
R20 "Resistor 10k +/-1% 0805 125 mW" RESC2013X50X35ML15T15 4469,2938 r270 top value=10k
R21 "CRGCQ0603F2K2" FP-CRGCQ0603-IPC_A 1925,2065 r0 top
R22 "RES 220R 5% 100mW 0603" RES_0603_LD 4758,2717 r90 top value=220
R23 "Resistor 10k +/-1% 0805 125 mW" RESC2013X50X35ML15T15 7305.2,3595 r0 top value=10k
R24 "Resistor 10k +/-1% 0805 125 mW" RESC2013X50X35ML15T15 5700.2,3600 r0 top value=10k
R25 "Resistor 10k +/-1% 0805 125 mW" RESC2013X50X35ML15T15 6745.2,3595 r0 top value=10k
R26 "Resistor 10k +/-1% 0805 125 mW" RESC2013X50X35ML15T15 5185.2,3605 r0 top value=10k
R27 "Resistor 10k +/-1% 0805 125 mW" RESC2013X50X35ML15T15 6225.2,3605 r0 top value=10k
R28 "RC0603FR-075K1L" RESC1608X55X25ML10T15 2800,4035 r270 top value=5.1k
R29 "RC0603FR-075K1L" RESC1608X55X25ML10T15 2290,4040 r270 top value=5.1k
R30 "RT-0R00-F-1/10W-0603" 0603 1715,3480 r0 top value=0
R31 "RT-0R00-F-1/10W-0603" 0603 5137,1497 r0 top value=0
R32 "RT-0R00-F-1/10W-0603" 0603 5104,1613 r270 top value=0
R33 "ERJ-3EKF1000V" RESC1608X55X30LL15T15 1665,1559.37 r90 top value=100
R34 "ERJ-3EKF1000V" RESC1608X55X30LL15T15 1955,1563.19 r270 top value=100
R35 "RG1608N-470-W-T1" RESC1608X50X30ML20T20 7450,1565 r90 top value=47
R36 "RG1608N-470-W-T1" RESC1608X50X30ML20T20 7225,1560 r90 top value=47
R37 "RMCF0603FT220K" "New footprint 1" 5179,1591 r90 top value=220k
R38 "RMCF0603FT220K" "New footprint 1" 5244,1590 r270 top value=220k
R39 "RMCF0603FT220K" "New footprint 1" 5309,1593 r90 top value=220k
R40 "RMCF0603FT220K" "New footprint 1" 5037,1618 r90 top value=220k
R41 "RMCF0603FT220K" "New footprint 1" 4972,1616 r270 top value=220k
R42 "RMCF0603FT220K" "New footprint 1" 4907,1618 r90 top value=220k
R43 "RG1608N-470-W-T1" RESC1608X50X30ML20T20 6355,1545 r90 top value=47
R44 "RG1608N-470-W-T1" RESC1608X50X30ML20T20 6130,1540 r90 top value=47
R45 "ERJ-3EKF1000V" RESC1608X55X30LL15T15 2790,1539.37 r90 top value=100
R46 "ERJ-3EKF1000V" RESC1608X55X30LL15T15 3080,1543.19 r270 top value=100
R47 "ERJ-3EKF1000V" RESC1608X55X30LL15T15 3905,1559.37 r90 top value=100
R48 "ERJ-3EKF1000V" RESC1608X55X30LL15T15 4195,1563.19 r270 top value=100
R49 "2.2k" FP-CRGCQ0603-IPC_A 5027,3067 r90 top
Rx "TP Clip 1206  RCWCTE" "1206 TP Clip RCWCTE-Footprint-1" 6026,2183 r90 top
SCK "TP Clip 1206  RCWCTE" "1206 TP Clip RCWCTE-Footprint-1" 3788,2435 r90 top
SCL "TP Clip 1206  RCWCTE" "1206 TP Clip RCWCTE-Footprint-1" 7855,1976 r180 top
SDA "TP Clip 1206  RCWCTE" "1206 TP Clip RCWCTE-Footprint-1" 7861,1753 r180 top
SW1 "BTN 12V 0.05A PTS526SMG15SMTR2 LFS" PTS526SMG15SMTR2-Footprint-1 4559,2425 r0 top
Tx "TP Clip 1206  RCWCTE" "1206 TP Clip RCWCTE-Footprint-1" 5731,2188 r90 top
U1 "IC BUCK LMR51625XDDCR" "IC BUCK LMR51625XDDCR-Footprint-1" 1720.15,2943 r0 top
U2 "LM66100" FP-DCK0006A-MFG 2715,3701 r0 top
U3 "MIC5209YM-TR" MIC5209YM-TR-Footprint-1 3310,3080 r0 top
U4 "LM66100" FP-DCK0006A-MFG 2537,3689 r0 top
U5 "AL5809-20S1-7" DIOD-SOD123-A_V 1210,3710 r90 top
U6 "AL5809-20S1-7" DIOD-SOD123-A_V 2920,4085 r90 top
U7 "AL5809-20S1-7" DIOD-SOD123-A_V 2266,3281.99 r90 top
U8 "AL5809-20S1-7" DIOD-SOD123-A_V 3590,3065 r90 top
U9 "LM66100" FP-DCK0006A-MFG 2873,3356 r0 top
U10 "MIC5209YM-TR" MIC5209YM-TR-Footprint-1 2815,2930 r0 top
U11 "AL5809-20S1-7" DIOD-SOD123-A_V 3155,3345 r90 top
U12 "LM66100" FP-DCK0006A-MFG 2876,3229 r0 top
U13 "STM32G491ME" STM32G491ME-Footprint-1 5175,2690 r0 top
U14 "AL5809-20S1-7" DIOD-SOD123-A_V 4197.45,2743.03 r270 top
U15 "AL5809-20S1-7" DIOD-SOD123-A_V 4318.72,2743.03 r270 top
U16 "AL5809-20S1-7" DIOD-SOD123-A_V 4440,2743.03 r270 top
U17 "AL5809-20S1-7" DIOD-SOD123-A_V 7510.2,4005 r270 top
U18 "AL5809-20S1-7" DIOD-SOD123-A_V 5905.2,4010 r270 top
U19 "AL5809-20S1-7" DIOD-SOD123-A_V 6950.2,4005 r270 top
U20 "AL5809-20S1-7" DIOD-SOD123-A_V 5390.2,4015 r270 top
U21 "AL5809-20S1-7" DIOD-SOD123-A_V 6430.2,4015 r270 top
U22 "SN65HVD72D RS485" D0008A_L 5965,2565 r0 top
U23 "MAX31856MUD+" FP-U14-2-MFG 1806.77,1825 r90 top
U24 "NAU7802SGI" NAU7802SGI-Footprint-1 7435,1865 r90 top
U25 "W25N04KVZEIR 4Gb 3V Nand" "W25N04KVZEIR 4Gb 3V Nand-Footprint-1" 5195,1970 r0 top
U26 "NAU7802SGI" NAU7802SGI-Footprint-1 6340,1845 r90 top
U27 "MAX31856MUD+" FP-U14-2-MFG 2931.77,1805 r90 top
U28 "MAX31856MUD+" FP-U14-2-MFG 4046.77,1825 r90 top
VBUS "5003" KSTN-5003 2873,3900 r0 top (schematic designator TP6)
Y1 "CRY 32MHZ 18PF SMD" ABM8-32.000MHZ-B2-T-Footprint-1 4637,2777 r0 top

## Footprints (in the part's own frame and the unit in brackets; to place one, negate y for a bottom-side part, rotate by r counter-clockwise, add the part's x,y. Pads: shape width x height; smd on the part's side, far side on the other; paste and mask are expansions set on the pad)
0.1uF-FP-CGA3E-0_3-0_1-IPC_A [mm]
  rrect25% 0.66x0.76 smd: 1(-0.7,0) 2(0.7,0)
  silkscreen extent 0,-0.3 0,0.3, body extent -0.8,-0.4 0.8,0.4, height 0.95
0603 [mm]
  rect 0.8x0.9 smd: 1(-0.7,0) 2(0.7,0)
  silkscreen extent -1.4,-0.75 1.4,0.75, body extent -0.88,-0.48 0.87,0.47, height 1.3
"1206 TP Clip RCWCTE-Footprint-1" [mm]
  rect 4.2x1.5 smd: 1(0,0)
  body extent -1.6,-0.8 1.6,0.8, height 2.01
10000pF-CAP_1608_TDK [mil]
  rect 22x35 smd paste+0 mask+0: 1(-36.5,0) 2(36.5,0)
  silkscreen extent -83,-23 13,23, body extent -34,-17 34,17, height 35
ABM8-32.000MHZ-B2-T-Footprint-1 [mil]
  rect 51x51 smd paste+0 mask+0: 1(-29.5,45)
  rect 41x51 smd paste+0 mask+0: 2(-34.5,-45) 3(34.5,-45) 4(34.5,45)
  silkscreen extent -85,-7 58,80, body extent -53,-67 53,67, height 32
AVAG-HSMX-C190_V [mm] "SMD, 2-Leads, Body 1.6x0.8mm, Height 0.9mm"
  rect 0.8x0.8 smd: 1(-0.75,0) 2(0.75,0)
  silkscreen extent 1.65,-0.4 1.65,0.4, body extent -0.8,-0.4 0.8,0.4, height 0.9
CAP_0603 [mm]
  rect 1x1.2 smd: 1(-0.7,0) 2(0.7,0)
  silkscreen extent -1.52,-0.89 1.52,0.89, body extent -1.43,-0.71 1.52,0.76, height 0.25
CAP_0603_LD [mm]
  rect 1x1.2 smd: 1(-0.7,0) 2(0.7,0)
  silkscreen extent -1.52,-0.89 1.52,0.89, body extent -1.43,-0.71 1.52,0.76, height 0.25
CAPC0402(1005)60_L [mm] "Chip Capacitor, Body 1.0x0.5mm, Height 0.6mm, IPC High Density"
  rrect25% 0.5x0.55 smd: 1(-0.45,0) 2(0.45,0)
  silkscreen extent 0,-0.2 0,0.2, body extent -0.5,-0.25 0.5,0.25, height 0.6
CAPC0805(2012)145_L [mm] "Chip Capacitor, Body 2.0x1.2mm, Height 1.45mm, IPC High Density"
  rrect25% 0.76x1.3 smd: 1(-0.9,0) 2(0.89,0)
  silkscreen extent -0.3,-0.55 0.3,0.55, body extent -1,-0.6 1,0.6, height 1.45
CAPC1608X90X40NL10T20 [mm] "Chip Capacitor, 2-Leads, Body 1.70x0.90mm, IPC Medium Density"
  rect 0.95x0.95 smd: 1(-0.625,0) 2(0.625,0)
  body extent -0.85,-0.45 0.85,0.45, height 0.9
CAPC2013X135X45ML10T25 [mm] "Chip Capacitor, 2-Leads, Body 2.10x1.35mm, IPC Low Density"
  rect 1x1.3 smd: 1(-0.75,0) 2(0.75,0)
  body extent -1.05,-0.67 1.05,0.67, height 1.35
CAPC2013X145X50ML20T25 [mm] "Chip Capacitor, 2-Leads, Body 2.2x1.45mm, IPC Low Density"
  rect 1.5x1.55 smd: 1(-0.9,0) 2(0.9,0)
  body extent -1.1,-0.72 1.1,0.73, height 1.45
CAPPR55-200-1100X500X1200 [mm] "THD, 2-Leads, Dia 5mm, Pin Spacing 2mm"
  rect 1.3x1.3 hole 0.8: 1(-1,0)
  round 1.3 hole 0.8: 2(1,0)
  silkscreen extent -2.5,-2.5 2.5,2.5, body extent -2.5,-2.5 2.45,2.5, height 12
CL32B475KCVZW6E-Footprint-1 [mil]
  rect 53x110 smd paste+0 mask+0: 1(-58.5,0) 2(58.5,0)
  silkscreen extent -20,-60 20,60, body extent -71,-55 71,55, height 110
CMI-1210-5-95T-Footprint-1 [mm]
  round 2.5 hole 0.8: N(3.8,0)
  rect 2.5x2.5 / inner round 2.5 / far side rect 2.5x2.5 hole 0.8: P(-3.8,0)
  silkscreen extent -8.69,-6 6,6, body extent -6,-6 6,6, height 7
"CON 54-00247-Footprint-1" [mm]
  round 2.8 hole 2.8 unplated: 0(-7.5,-4) 0(7.5,-4)
  round 2.3 hole 2.3 unplated: 0(-7.5,0) 0(7.5,0)
  rect 1.7x1.7 / inner round 1.7 / far side rect 1.7x1.7 hole 1.3 mask+0.05: 1(-1.768,1.768)
  round 1.7 hole 1.3 mask+0.05: 2(1.768,1.768) 3(1.768,-1.768) 4(-1.768,-1.768) 5(0,0) S1(0,-4)
  silkscreen extent -9.75,-9 9.75,2.1, body extent -9.75,-23 9.75,2, height 16
"CON 0430450800-Footprint-1" [mm]
  round 3 hole 3 unplated mask+0.076: 0(-6.85,-4.32) 0(-2.15,-4.32)
  rect 1.52x1.52 / inner round 1.52 / far side rect 1.52x1.52 hole 1.02 mask+0.076: 1(0,0)
  round 1.52 hole 1.02 mask+0.076: 2(-3,0) 3(-6,0) 4(-9,0) 5(0,3) 6(-3,3) 7(-6,3) 8(-9,3)
  silkscreen extent -12.57,-8.92 4.62,3.32
"Copy of 0603" [mm]
  rect 0.8x0.9 smd: 1(-0.7,0) 2(0.7,0)
  silkscreen extent -1.4,-0.75 1.4,0.75, body extent -0.88,-0.48 0.87,0.47, height 1.3
"Copy of CAPC0603(1608)100_L" [mm] "Chip Capacitor, Body 1.6x0.8mm, Height 1.0mm, IPC High Density"
  rrect25% 0.66x0.76 smd: 1(-0.7,0) 2(0.7,0)
  silkscreen extent 0,-0.3 0,0.3, body extent -0.8,-0.4 0.8,0.4, height 0.95
D0008A_L [mm] "SOIC, 8-Leads, Body 5x4mm, Pitch 1.27mm, IPC High Density"
  rrect18% 1.25x0.55 smd: 1(-2.625,1.905) 2(-2.625,0.635) 3(-2.625,-0.635) 4(-2.625,-1.905) 5(2.625,-1.905) 6(2.625,-0.635) 7(2.625,0.635) 8(2.625,1.905)
  silkscreen extent -2.75,-2.5 1.6,2.85, body extent -3,-2.45 3,2.45, height 1.63
DIOD-SOD123-A_V [mm] "SMD, 2-Leads, Body 2.65x1.55mm"
  rect 0.9x0.95 smd: 1(-1.575,0) 2(1.575,0)
  silkscreen extent -2.7,-0.77 0.86,0.77, body extent -1.33,-0.77 1.33,0.77, height 1.41
FP-70246-1201-0 [mm]
  rect 1.74x1.74 hole 1.14 paste-2539.97 mask+0: 1(-6.35,-1.27)
  round 1.74 hole 1.14 paste-2539.97 mask+0: 2(-6.35,1.27) 3(-3.81,-1.27) 4(-3.81,1.27) 5(-1.27,-1.27) 6(-1.27,1.27) 7(1.27,-1.27) 8(1.27,1.27) 9(3.81,-1.27) 10(3.81,1.27) 11(6.35,-1.27) 12(6.35,1.27)
  silkscreen extent -12.25,-4.54 11.53,4.54, body extent -11.63,-4.64 11.63,4.64, height 0.25
FP-CRGCQ0603-IPC_A [mil]
  rect 45.6x39.85 smd paste+0 mask+0: 1(-32.56,0) 2(32.56,0)
  silkscreen extent -55,-36 55,36, body extent -75,-40 75,40, height 10
FP-DCK0006A-MFG [mm]
  rect 0.9x0.4 smd paste-1000 mask+0: 1(-1.1,0.65) 2(-1.1,0) 3(-1.1,-0.65) 4(1.1,-0.65) 5(1.1,0) 6(1.1,0.65)
  silkscreen extent -2.22,-1.07 0.27,1.07, body extent -1.65,-1.33 1.65,1.33, height 0.25
FP-OS-CON-SMT-C6-MFG [mm]
  rect 3.5x1.6 smd paste+0 mask+0: 1(-2.8,0) 2(2.8,0)
  silkscreen extent -5.22,-3.4 3.4,3.4, body extent -4.8,-3.65 4.8,3.65, height 0.25
FP-SOT363-IPC_C [mm]
  rect 0.91x0.332 smd paste+0 mask+0: 1(-0.801,0.65)
  rrect100% 0.91x0.332 smd paste+0 mask+0: 2(-0.801,0) 3(-0.801,-0.65) 4(0.801,-0.65) 5(0.801,0) 6(0.801,0.65)
  silkscreen extent -2.18,-1.33 1.05,1.33, body extent -1.36,-1.17 1.36,1.17, height 0.25
FP-U14-2-MFG [mm]
  rect 1.4x0.35 smd paste+0 mask+0: 1(-2.875,1.95) 2(-2.875,1.3) 3(-2.875,0.65) 4(-2.875,0) 5(-2.875,-0.65) 6(-2.875,-1.3) 7(-2.875,-1.95) 8(2.875,-1.95) 9(2.875,-1.3) 10(2.875,-0.65) 11(2.875,0) 12(2.875,0.65) 13(2.875,1.3) 14(2.875,1.95)
  silkscreen extent -4.3,-2.55 2.25,2.55
FP-USB4085-GF-A-MFG [mm]
  rrect100% 0.9x2.4 hole 2.1 slot 0.6 at 0 deg paste-2539.97 mask+0: 1(-4.325,3.045) 2(4.325,3.045)
  rrect100% 0.9x1.7 hole 1.4 slot 0.6 at 0 deg paste-2539.97 mask+0: 3(-4.325,-0.335) 4(4.325,-0.335)
  round 0.65 hole 0.4 paste-2539.97 mask+0: A1(-2.975,4.025) A4(-2.125,4.025) A5(-1.275,4.025) A6(-0.425,4.025) A7(0.425,4.025) A8(1.275,4.025) A9(2.125,4.025) A12(2.975,4.025) B1(2.975,2.675) B4(2.125,2.675) B5(1.275,2.675) B6(0.425,2.675) B7(-0.425,2.675) B8(-1.275,2.675) B9(-2.125,2.675) B12(-2.975,2.675)
  silkscreen extent -4.57,0.89 4.57,5.37, body extent -4.87,-4.83 4.87,4.83, height 0.25
"HEADER 4pos 2.54mm-Footprint-1" [mm]
  rect 0.985x0.985 hole 0.635: 01(-3.81,0)
  round 0.985 hole 0.635: 02(-1.27,0) 03(1.27,0) 04(3.81,0)
  silkscreen extent -5.08,-1.27 5.08,1.27
"IC BUCK LMR51625XDDCR-Footprint-1" [mm]
  rect 1.1x0.6 smd paste+0 mask+0: 1(-1.35,0.95) 2(-1.35,0) 3(-1.35,-0.95) 4(1.35,-0.95) 5(1.35,0) 6(1.35,0.95)
  silkscreen extent -2.57,-1.53 0.42,1.53
"IND WIR 22uH 3.5A 20%-Footprint-1" [mil]
  rect 157x276 smd paste+0 mask+0: 1(-196.5,0) 2(196.5,0)
  silkscreen extent -261,-261 261,261, body extent -256,-256 256,256, height 335
JST-S2B-XH-A(LF)(SN)_V [mm] "Header, 2-Leads, Body 7.4x11.5mm, Pitch 2.5mm"
  rect 1.4x1.4 hole 0.9: 1(-1.25,0)
  round 1.4 hole 0.9: 2(1.25,0)
  silkscreen extent -3.7,-9.2 3.7,3.08, body extent -3.7,-9.2 3.7,2.3, height 5.95
KSTN-5003 [mm] "Test Point, Through Hole, Dia 2.54mm"
  round 1.5 hole 1: 1(0,0)
  silkscreen extent -1.27,-1.27 1.27,1.27, body extent -1.27,-1.27 1.27,1.27, height 4.57
LTST-C191KRKT_V [mm] "SMD, 2-Leads, Body 1.6x0.8mm"
  rect 0.8x0.8 smd: 1(-0.75,0) 2(0.75,0)
  silkscreen extent 1.65,-0.4 1.65,0.4, body extent -0.8,-0.4 0.8,0.4, height 0.9
MIC5209YM-TR-Footprint-1 [mil]
  rect 65.5x21 smd paste+0 mask+0: 1(-106.25,75) 2(-106.25,25) 3(-106.25,-25) 4(-106.25,-75) 5(116.25,-75) 6(116.25,-25) 7(116.25,25) 8(116.25,75)
  silkscreen extent -78,-103 88,103, body extent -117,-98 127,98, height 66
MMBT3904-TP-Footprint-1 [mil]
  rect 22x63 smd paste+0 mask+0: 1(-37.75,-34.5) 2(37.75,-34.5) 3(0,34.5)
  silkscreen extent -65,-32 65,32, body extent -60,-52 60,52, height 48
NAU7802SGI-Footprint-1 [mm]
  rrect25% 1.97x0.6 smd: 1(-2.475,4.445) 2(-2.475,3.175) 3(-2.475,1.905) 4(-2.475,0.635) 5(-2.475,-0.635) 6(-2.475,-1.905) 7(-2.475,-3.175) 8(-2.475,-4.445) 9(2.475,-4.445) 10(2.475,-3.175) 11(2.475,-1.905) 12(2.475,-0.635) 13(2.475,0.635) 14(2.475,1.905) 15(2.475,3.175) 16(2.475,4.445)
  silkscreen extent -4.1,-4.95 1.17,4.95, body extent -3,-4.95 3,4.95, height 1.75
"New footprint 1" [mil]
  rect 28x37 smd paste+0 mask+0: 1(-28.42,-0.1) 2(26.58,-0.1)
  body extent -34,-19 33,18, height 22
PJA3404_R1_00001-Footprint-1 [mm]
  rect 1.8x0.6 smd: 1(-1,0.95) 2(-1,-0.95) 3(1,0)
  silkscreen extent -1.12,-1.55 0.7,1.92, body extent -0.7,-1.52 0.7,1.53, height 1.12
PTS526SMG15SMTR2-Footprint-1 [mm]
  rect 1x0.7 smd: 1(-3,1.85) 2(3,1.85) 3(-3,-1.85) 4(3,-1.85)
  rect 0.7x0.6 smd: G1(0,2.5) G2(0,-2.5)
  silkscreen extent -4.2,-2.6 2.6,2.6, body extent -3.2,-2.6 3.2,2.6, height 1.7
"RES 8.66K OHM 1% 1_8W 0805-Footprint-1" [mm]
  rect 1x1.4 smd: 1(-0.95,0) 2(0.95,0)
  silkscreen extent -0.05,-0.6 0.05,0.6, body extent -1.1,-0.7 1.1,0.7, height 0.5
"RES 15.8k 1% 0.1W 0603-Footprint-1" [mm]
  rect 0.8x0.9 smd: 1(-0.7,0) 2(0.7,0)
  silkscreen extent -1.27,-0.64 1.27,0.64, body extent -0.88,-0.48 0.87,0.47, height 1.3
"RES 47.5k 1% 0.1W 0603-Footprint-1" [mm]
  rect 0.8x0.9 smd: 1(-0.7,0) 2(0.7,0)
  silkscreen extent -1.27,-0.64 1.27,0.64, body extent -0.88,-0.48 0.87,0.47, height 1.3
"RES 75k 1% 0.1W 0603-Footprint-1" [mm]
  rect 0.8x0.9 smd: 1(-0.7,0) 2(0.7,0)
  silkscreen extent -1.27,-0.64 1.27,0.64, body extent -0.88,-0.48 0.87,0.47, height 1.3
RES_0603_LD [mm] "Chip Resistor, Body 1.6x0.8mm, IPC High Density"
  rect 1x1.2 smd: 1(-0.7,0) 2(0.7,0)
  silkscreen extent -1.52,-0.89 1.52,0.89, body extent -0.8,-0.4 0.8,0.4, height 0.45
RESC1005X40X25ML05T05 [mm] "Chip Resistor, 2-Leads, Body 1.05x0.55mm, IPC Low Density"
  rect 0.65x0.65 smd: 1(-0.5,0) 2(0.5,0)
  body extent -0.53,-0.28 0.53,0.28, height 0.4
RESC1608X50X30ML20T20 [mm] "Chip Resistor, 2-Leads, Body 1.60x0.80mm, IPC Low Density"
  rect 1x1.1 smd: 1(-0.7,0) 2(0.7,0)
  body extent -0.9,-0.5 0.9,0.5, height 0.5
RESC1608X55X25ML10T15 [mm] "Chip Resistor, 2-Leads, Body 1.60x0.80mm, IPC Low Density"
  rect 0.8x1 smd: 1(-0.75,0) 2(0.75,0)
  body extent -0.85,-0.45 0.85,0.45, height 0.55
RESC1608X55X30LL15T15 [mm] "Chip Resistor, 2-Leads, Body 1.60x0.80mm, IPC High Density"
  rect 0.7x0.85 smd: 1(-0.625,0) 2(0.625,0)
  body extent -0.87,-0.48 0.87,0.48, height 0.55
RESC2013X50X35ML15T15 [mm] "Chip Resistor, 2-Leads, Body 2.2x1.4mm, IPC Low Density"
  rect 1.2x1.5 smd: 1(-1.05,0) 2(1.05,0)
  silkscreen extent -0.05,-0.65 0.05,0.65, body extent -1.1,-0.7 1.1,0.7, height 0.5
RESC2013X70X40ML20T20 [mm] "Chip Resistor, 2-Leads, Body 2.2x1.35mm, IPC Low Density"
  rect 1.35x1.45 smd: 1(-0.975,0) 2(0.975,0)
  body extent -1.1,-0.67 1.1,0.67, height 0.7
STM32G491ME-Footprint-1 [mil]
  rect 58x11 smd paste+0 mask+0: 1(-260.5,187.01) 2(-260.5,167.32) 3(-260.5,147.64) 4(-260.5,127.95) 5(-260.5,108.27) 6(-260.5,88.58) 7(-260.5,68.9) 8(-260.5,49.21) 9(-260.5,29.53) 10(-260.5,9.84) 11(-260.5,-9.84) 12(-260.5,-29.53) 13(-260.5,-49.21) 14(-260.5,-68.9) 15(-260.5,-88.58) 16(-260.5,-108.27) 17(-260.5,-127.95) 18(-260.5,-147.64) 19(-260.5,-167.32) 20(-260.5,-187.01) 41(260.5,-187.01) 42(260.5,-167.32) 43(260.5,-147.64) 44(260.5,-127.95) 45(260.5,-108.27) 46(260.5,-88.58) 47(260.5,-68.9) 48(260.5,-49.21) 49(260.5,-29.53) 50(260.5,-9.84) 51(260.5,9.84) 52(260.5,29.53) 53(260.5,49.21) 54(260.5,68.9) 55(260.5,88.58) 56(260.5,108.27) 57(260.5,127.95) 58(260.5,147.64) 59(260.5,167.32) 60(260.5,187.01)
  rect 11x58 smd paste+0 mask+0: 21(-187.01,-260.5) 22(-167.32,-260.5) 23(-147.64,-260.5) 24(-127.95,-260.5) 25(-108.27,-260.5) 26(-88.58,-260.5) 27(-68.9,-260.5) 28(-49.21,-260.5) 29(-29.53,-260.5) 30(-9.84,-260.5) 31(9.84,-260.5) 32(29.53,-260.5) 33(49.21,-260.5) 34(68.9,-260.5) 35(88.58,-260.5) 36(108.27,-260.5) 37(127.95,-260.5) 38(147.64,-260.5) 39(167.32,-260.5) 40(187.01,-260.5) 61(187.01,260.5) 62(167.32,260.5) 63(147.64,260.5) 64(127.95,260.5) 65(108.27,260.5) 66(88.58,260.5) 67(68.9,260.5) 68(49.21,260.5) 69(29.53,260.5) 70(9.84,260.5) 71(-9.84,260.5) 72(-29.53,260.5) 73(-49.21,260.5) 74(-68.9,260.5) 75(-88.58,260.5) 76(-108.27,260.5) 77(-127.95,260.5) 78(-147.64,260.5) 79(-167.32,260.5) 80(-187.01,260.5)
  silkscreen extent -310,-310 310,310, body extent -276,-276 276,276, height 63
"W25N04KVZEIR 4Gb 3V Nand-Footprint-1" [mil]
  rect 34x17 smd paste+0 mask+2: 1(-154.5,75) 2(-154.5,25) 3(-154.5,-25) 4(-154.5,-75) 5(154.5,-75) 6(154.5,-25) 7(154.5,25) 8(154.5,75)
  rect 136x171 smd paste+0 mask+2: 9(0,0)
  silkscreen extent -227,-125 164,125, body extent -159,-120 159,120, height 32

## Part data
3V3 5V 5VFSB 10V GND GND GND VBUS: library part CMP-002-00037-2, "Test Point, Orange, Height 4.6 mm, Tail Length 3 mm, 1-Pin THD, RoHS", Colour=Orange, Manufacturer=Keystone, Package Description="1-Pin Through Hole Device, Dia 2.54 mm", Package Quantity=10, Case/Package=5003, Connector Type=TestPoint, Contact Material=Bronze, Contact Plating=Tin, Datasheet URL=http://keyelco.com/userAssets/file/M65p56.pdf, Datasheet Version=Jun-15, Diameter=2.54mm, Manufacturer URL=http://www.keyelco.com/, Mounting Technology=TH, Package Reference=5003, Packaging=Bulk, Pins=1, RoHS Compliant=True
C1: library part CMP-001-00067-4, "Chip Capacitor, 100nF +/-20%, 50V, 0402, Thickness 0.6 mm", Case/Package=0402, Max Operating Temperature=85°C, Min Operating Temperature=-55°C, Tolerance=10%, Voltage Rating=50V, Mounting Technology=SMT, Pins=2
C2: library part CMP-001-00029-9, "ECA1HM2R2 Aluminum Electrolytic Capacitor, 2.2 uF, +/- 20%, 50 V, -40 to 85 degC, 2-Pin THD, RoHS, Bulk", Capacitor Type=Electrolytic, Case/Package=Radial, Manufacturer=Panasonic, Max Operating Temperature=85°C, Min Operating Temperature=-40°C, Package Description="2-Pin Radial Lead, Dia 5 mm, Height 12 mm", Package Quantity=200, Package Reference=CAPPR55-200-1100X500X1200, Ripple Current=20mA, Tolerance=20%, Voltage Rating=50V, Datasheet URL=https://industrial.panasonic.com/cdbs/www-data/pdf/RDF0000/ABA0000C1218.pdf, Datasheet Version="Rev. 05, 10/2016", Diameter=5mm, Lead Pitch=2mm, Manufacturer URL=http://www.panasonic.com/, Mounting Technology=TH, Packaging=Bulk, Pins=2, Ripple Current (AC)=20mA, RoHS Compliant=True
C3: library part CMP-001-00197-2, "C1210C104K1RACAUTO - Cap Ceramic 0.1uF 100V X7R 10% Pad SMD 1210 125C Automotive T/R", Capacitor Type=Ceramic, Case/Package=1210, Max Operating Temperature=125°C, Min Operating Temperature=-55°C, Tolerance=10%, Voltage Rating=100V, Mounting Technology="Surface Mount", Pins=2, RoHS Compliant=Yes
C4 C5 C6: library part CMP-001-00122-1, "CL10A105KB8NNNC - Ceramic Capacitor, Multilayer, Ceramic, 50V, 10% +Tol, 10% -Tol, X5R, 15% TC, 1uF, Surface Mount, 0603", Capacitor Type=Ceramic, Case Code (Imperial)=0603, Case Code (Metric)=1608, Dielectric=X7R, Max Operating Temperature=85°C, Min Operating Temperature=-55°C, Package Shape=Rectangular, Package Style=SMTMeter, Rated DC Voltage (URdc)=50V, Temperature Characteristics Code=X5R, Tolerance=10%, Voltage=16V, Case/Package=0603, Construction=Flat, Depth=0.8mm, Dielectric Material=Ceramic, Height=0.9mm, JESD-609 Code=e3, Lead Free="Lead Free", Length=1.6mm, Material=Ceramic, Mounting Technology="Surface Mount", Multilayer=Yes, Packaging="Tape and Reel", Pins=2, Radiation Hardening=No, Reach SVHC Compliant=Yes, RoHS Compliant=Yes, Series=CL, Terminal Finish=Nickel, Termination=Wraparound, Thickness=0.035inch, Tolerance  (fill in as +-)=10%, Tolerance (fill in as +-)=10%, Voltage Rating=16V, Voltage Rating (DC)=16V, Width=0.8mm
C7 C8 C9: library part CMP-001-00079-5, "Chip Capacitor, 10µF +/-20%, 25V, 0805, Thickness 1.45 mm", Case/Package=0805, Max Operating Temperature=85°C, Min Operating Temperature=-55°C, Tolerance=10%, Voltage Rating=25V, Mounting Technology=SMT, Pins=2
C10: library part CMP-001-00108-3, "25SVPF47M - Aluminum Electrolytic Capacitor, Polarized,  -Aluminum (wet), 25V, 20% +Tol, 20% -Tol, 47uF, Surface Mount, 2626", Capacitor Type=Aluminium, Case/Package=2626, Max Operating Temperature=105°C, Min Operating Temperature=-55°C, Ripple Current=140mA, Mounting Technology="Surface Mount", Pins=2, RoHS Compliant=Yes
C11 C12 C14 C15: library part CMP-001-00010-7, "Chip Capacitor, 1 uF, +/-10%, 25 V, 0805 (2012 Metric)", Capacitor Type=Ceramic, Case/Package=0805, Max Operating Temperature=125°C, Min Operating Temperature=-55°C, Tolerance=10%, Voltage Rating=25V, Mounting Technology=SM, Pins=2, RoHS Compliant=True
C13 C16: library part CMP-001-00212-1, "ECHU1C471GX5 Film Capacitor, Plastic, 16V, 2% +Tol, 2% -Tol, 0.00047uF, Surface Mount, 0603, ECHU1C471GX5", Case/Package=0603, Max Operating Temperature=125°C, Min Operating Temperature=-55°C, Tolerance=2%, Voltage Rating=16V, Mounting Technology="Surface Mount"
C17: library part CMP-001-00076-6, "CC0603MRX5R6BB475 Chip Capacitor, 4.7µF +/-20%, 10V, 0603, Thickness 1 mm", Case/Package=0603, Max Operating Temperature=85°C, Min Operating Temperature=-55°C, Tolerance=20%, Voltage Rating=10V, Mounting Technology="Surface Mount", Pins=2
C18 C29: library part CMP-001-00063-4, "Chip Capacitor, 1µF +/-20%, 10V, 0402, Thickness 0.6 mm", Case/Package=0402, Max Operating Temperature=85°C, Min Operating Temperature=-55°C, Tolerance=10%, Voltage Rating=10V, Mounting Technology=SMT, Pins=2
C19 C20 C21 C22 C23 C24 C26 C30 C31 C33 C47 C48 C50 C52 C53 C55: library part CMP-001-00093-3, "CGA3E2X7R1E104K080AA CAP CER 0.1UF 25V X7R 0603", Case/Package="0603 (1608 Metric)", Manufacturer="TDK Corporation", Manufacturer Part Number=CGA3E2X7R1E104K080AA, Operating Temperature="-55°C ~ 125°C", Temperature Coefficient=X7R, Tolerance=10%, Voltage - Rated=25V, ComponentLink1Description=Datasheet, ComponentLink1URL=https://product.tdk.com/info/en/catalog/spec/mlccspec_automotive_general_en.pdf, Design Item ID=CGA3E2X7R1E104K080AA, Mounting Type="Surface Mount, MLCC", Size / Dimension="0.063\" L x 0.031\" W (1.60mm x 0.80mm)", Source=PlumBay_SchLib.SchLib, Thickness (Max)="0.035\" (0.90mm)"
C25 C27: library part CMP-001-00123-1, "GRM1885C1H220JA01D - 22 pF ±5% 50V Ceramic Capacitor C0G, NP0 0603 (1608 Metric)", Capacitor Type=Ceramic, Case Code (Imperial)=0603, Case Code (Metric)=1608, Dielectric=C0G, Insulation Resistance=10GR, Max Operating Temperature=125°C, Min Operating Temperature=-55°C, Package Quantity=1, Package Shape=Rectangular, Package Style=SMTMeter, Rated DC Voltage (URdc)=50V, Temperature Characteristics Code=X7R, Temperature Coefficient=30ppm/°C, Tolerance=5%, Tolerance  (fill in as +-)=10%, Case/Package=0603, Construction=Flat, Depth=0.8mm, Dielectric Material=Ceramic, Height=0.8mm, JESD-609 Code=e3, Lead Free="Lead Free", Length=1.6mm, Material=Ceramic, Mounting Technology="Surface Mount", Multilayer=Yes, Packaging="Tape and Reel", Pins=2, Radiation Hardening=No, Reach SVHC Compliant=Yes, RoHS Compliant=Yes, Series=GRM, Size=0.8mm, Terminal Finish=Nickel, Termination=Wraparound, Thickness=0.035inch, Tolerance (fill in as +-)=10%, Voltage=50V, Voltage Rating=50V, Voltage Rating (DC)=50V, Width=0.8mm